# Altium PCB HMI_2.0_R0.PcbDoc
Units mil, origin at the board's own origin, x right, y up, seen from the top; angles counter-clockwise.
Board outline 6000 x 4000 mil, 2 copper layers (Top Layer, Bottom Layer); 41 components, 39 nets, 158 pads, 0 vias.
Unrouted connection lines stored in the file: 97.
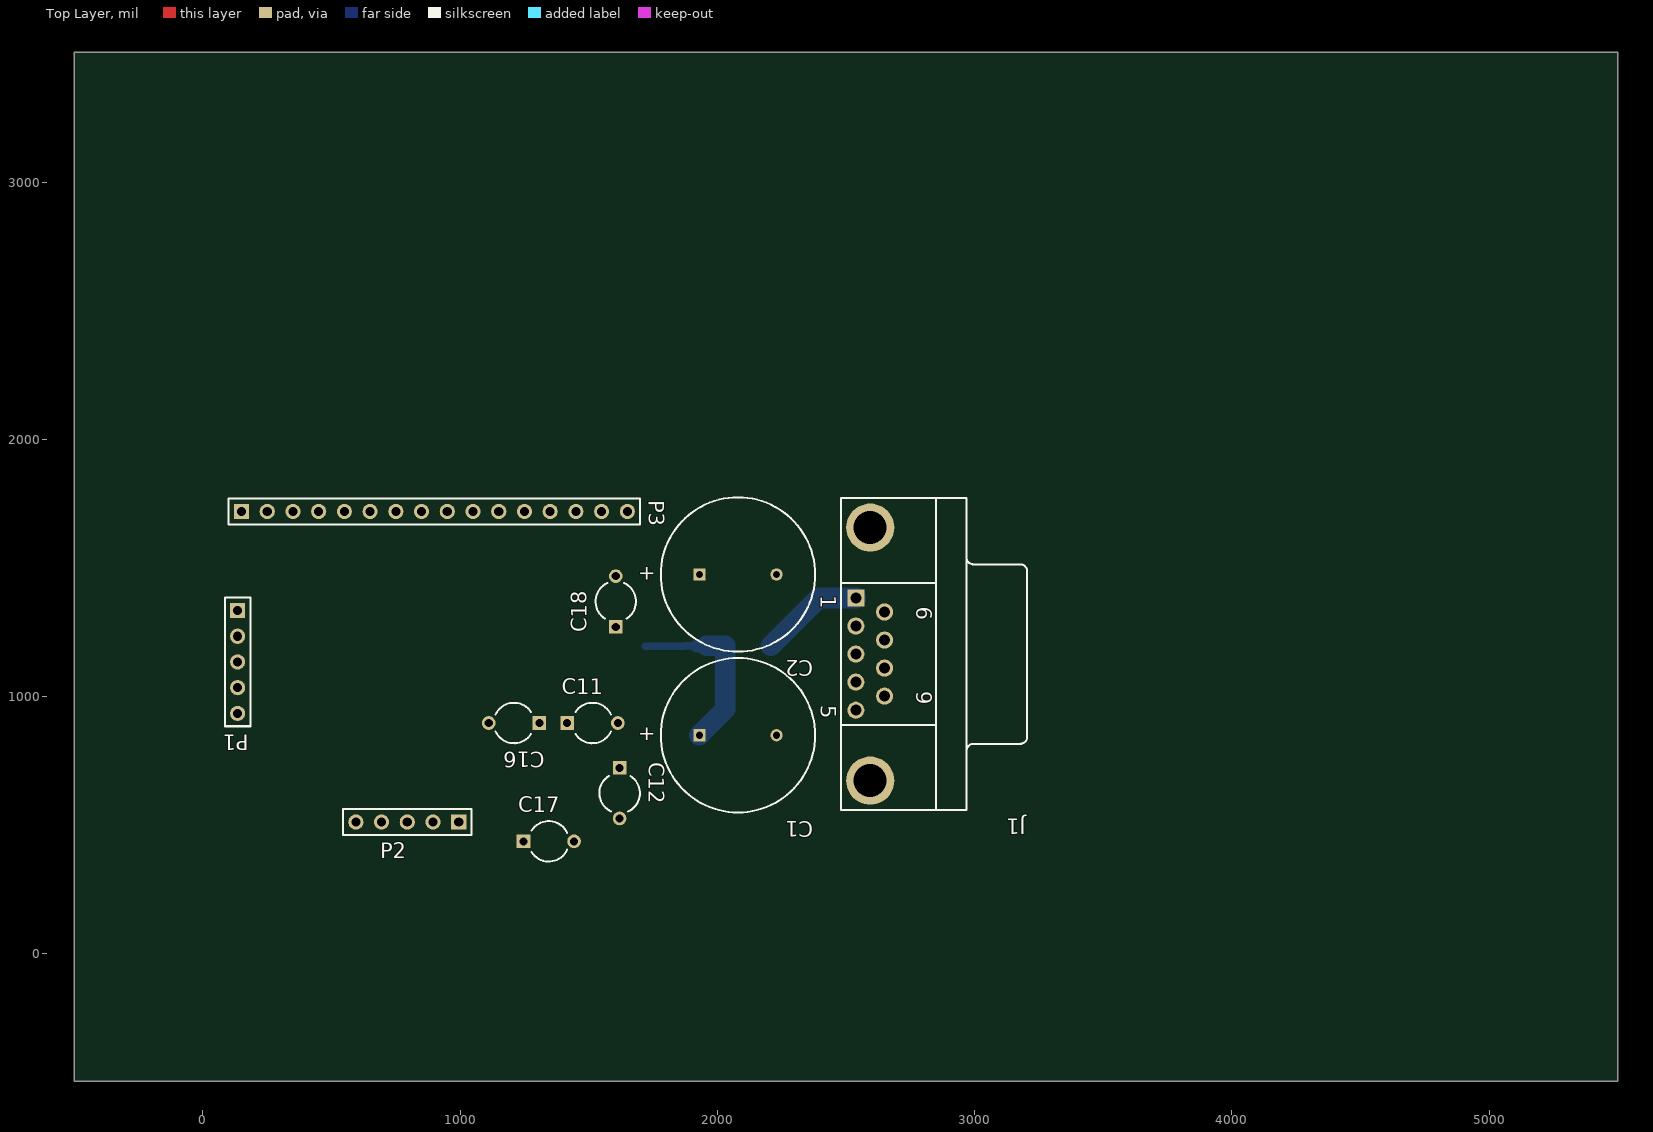
[diagram p0: Top Layer view]
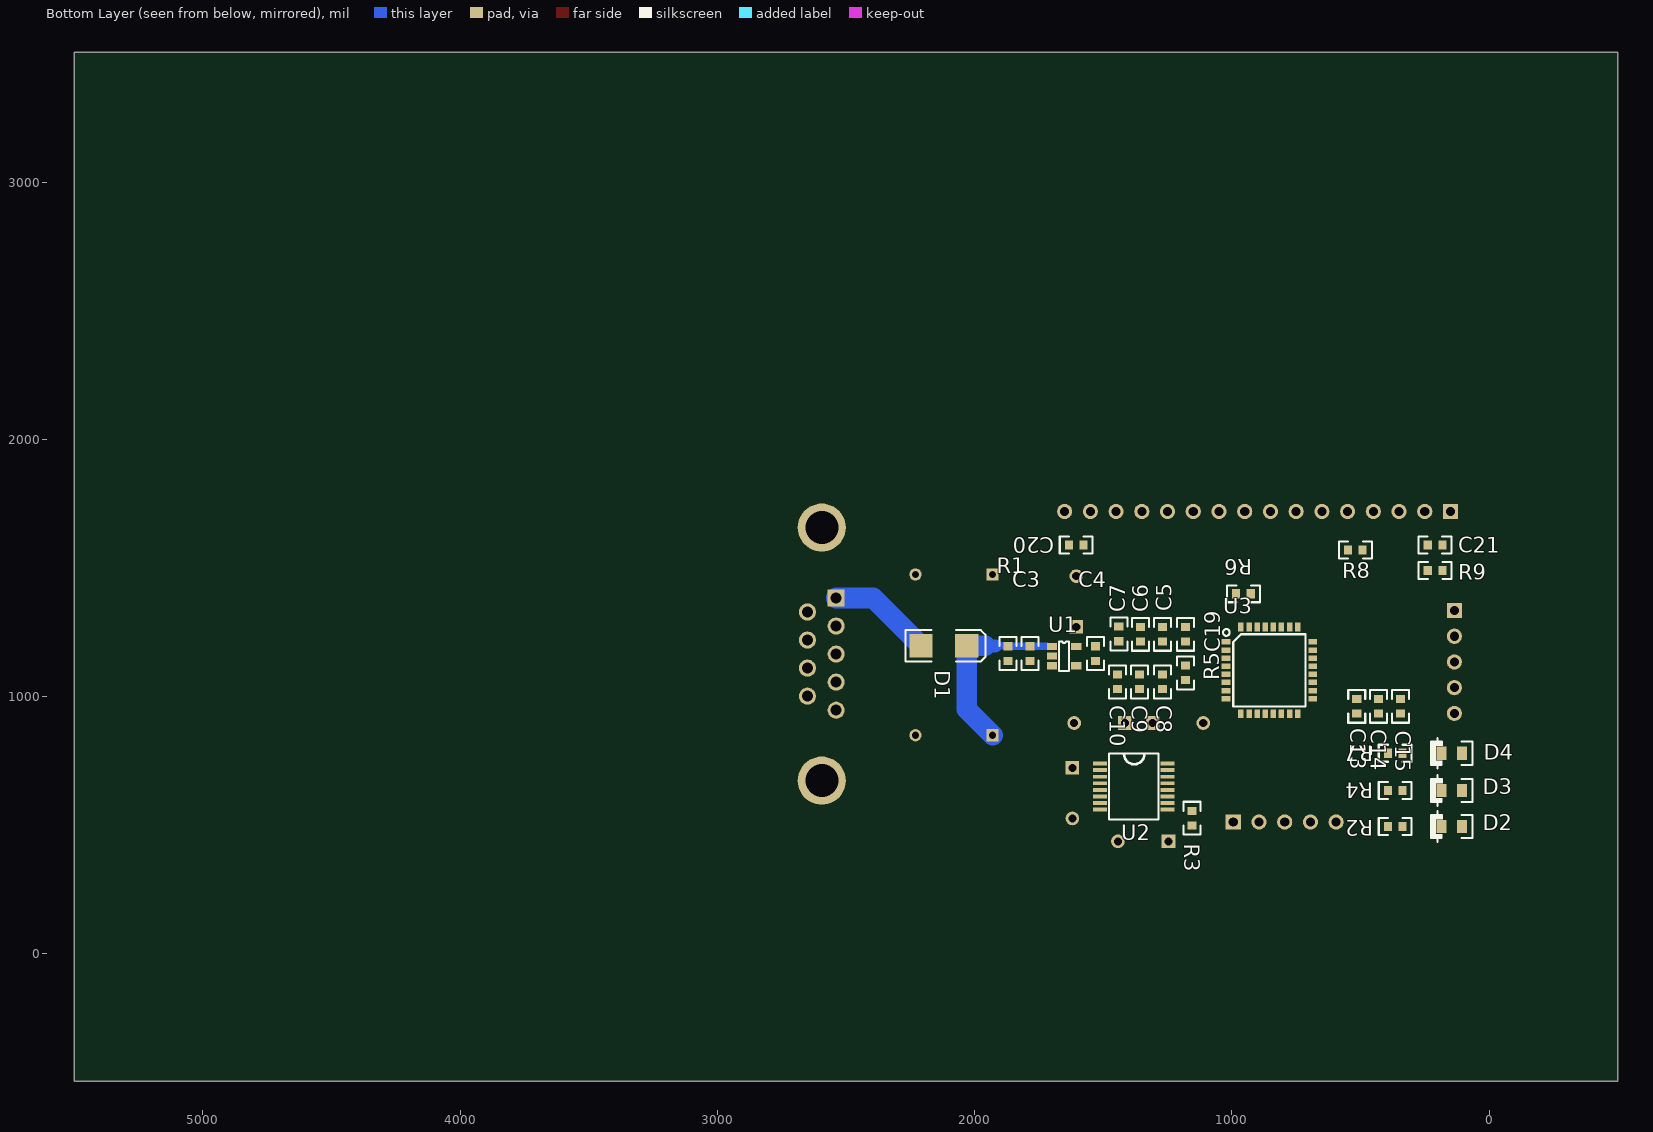
[diagram p1: Bottom Layer view, seen from below]

## Layer stack, top to bottom
Top Solder: solder mask 0.4, Solder Resist, Dk 3.5
Top Layer: signal copper 1.4
Dielectric 1: dielectric 12.6, FR-4, Dk 4.8
Bottom Layer: signal copper 1.4
Bottom Solder: solder mask 0.4, Solder Resist, Dk 3.5

## Board outline
-500,-495 5500,-495 5500,3505 -500,3505

## Design rules (kind name [scope] priority, off if disabled: settings)
Clearance [All] p1: gap=10 ignorepadtopadclearanceinfootprint=FALSE except(0: Arc-Hole Track-Hole SMDPad-Hole THPad-Hole Via-Hole Fill-Hole Poly-Hole Region-Hole Text-Hole)
PolygonConnect [All] p1: connectstyle=Relief reliefconductorwidth=10 reliefentries=4 polygonreliefangle="90 Angle" airgapwidth=10
RoutingVias [All] p1: holewidth=28 width=50 viastyle="Through Hole" minholewidth=28 minwidth=50 maxholewidth=28 maxwidth=50
SolderMaskExpansion [All] p1: expansion=4
Width [All] p1: maxlimit=80 minlimit=12 preferedwidth=20
30 further rules are at their usual default settings.

## Components (designator, comment, footprint, x,y, rotation, side; value= is the part's Value field where it differs from the comment)
C1 "" RB7.6-15 2080,850 r180 top value=100pF
C2 "" RB7.6-15 2080,1475 r180 top value=104pF
C3 "" 0603 1784.49,1167.6 r90 bottom value=104pF
C4 "" 0603 1529.49,1167.6 r90 bottom value=100pF
C5 "CTP1" 0603 1269.49,1242.6 r270 bottom value=10pF
C6 "CTP1" 0603 1354.49,1242.6 r270 bottom value=33pF
C7 "CTP1" 0603 1439.49,1244.05 r270 bottom value=104pF
C8 "CTP5" 0603 1269.49,1057.6 r90 bottom value=10pF
C9 "CTP5" 0603 1359.49,1057.6 r90 bottom value=33pF
C10 "CTP5" 0603 1444.49,1057.6 r90 bottom value=220pF
C11 "" CAPR5-4X5 1514.49,897.6 r0 top value=10uF
C12 "" CAPR5-4X5 1620,625 r270 top value=10uF
C13 "CTP17" 0603 514.49,962.6 r90 bottom value=10pF
C14 "CTP17" 0603 429.49,962.6 r90 bottom value=33pF
C15 "CTP17" 0603 344.49,962.6 r90 bottom value=104pF
C16 "" CAPR5-4X5 1209.49,897.6 r180 top value=10uF
C17 "" CAPR5-4X5 1344.49,437.6 r0 top value=10uF
C18 "" CAPR5-4X5 1605,1370 r90 top value=10uF
C19 "" 0603 1179.49,1242.6 r270 bottom value=100pF
C20 "" 0603 1605,1590 r0 bottom value=100pF
C21 "" 0603 210,1590 r0 bottom value=100pF
D1 "" SMB 2119.49,1197.6 r180 bottom
D2 "" 0805D 145,495 r0 bottom
D3 "" 0805D 145,635 r0 bottom
D4 "" 0805D 145,780 r0 bottom
J1 "" DSUB1.385-2H9 2968.11,1165.47 r270 top
P1 "" HDR1X5 135,1335 r270 top
P2 "" HDR1X5 994.49,512.6 r180 top
P3 "" HDR1X16 150,1720 r0 top
R1 "" 0603 1869.49,1167.6 r90 bottom value=1K
R2 "" 0603 365,495 r180 bottom value=1K
R3 "" 0603 1154.49,527.6 r270 bottom value=1K
R4 "" 0603 365,635 r0 bottom value=1K
R5 "" 0603 1179.49,1092.6 r270 bottom value=1K
R6 "" 0603 955,1400 r180 bottom value=1K
R7 "" 0603 365,780 r0 bottom value=1K
R8 "" 0603 520,1570 r180 bottom value=1K
R9 "" 0603 210,1490 r180 bottom value=1K
U1 "*" SOT-23-5L 1699.49,1195 r180 bottom
U2 "MAX232*" SSOP16 1512.09,739.96 r180 bottom
U3 "*" LQFP32 854.49,1102.6 r180 bottom

## Footprints (in the part's own frame and the unit in brackets; to place one, negate y for a bottom-side part, rotate by r counter-clockwise, add the part's x,y. Pads: shape width x height; smd on the part's side, far side on the other; paste and mask are expansions set on the pad)
0603 [mm]
  rect 0.8x0.9 smd: 1(-0.725,0) 2(0.725,0)
  silkscreen extent -1.63,-0.84 1.63,0.84
0805D [mm]
  rect 1x1.3 smd: 1(-1,0) 2(1,0)
  silkscreen extent -2.03,-1.52 2.03,1.52
CAPR5-4X5 [mm] "Capacitor; 2 Leads"
  rect 1.35x1.35 hole 0.8: 1(-2.5,0)
  round 1.35 hole 0.8: 2(2.5,0)
  silkscreen extent -1.69,-2 1.82,2
DSUB1.385-2H9 [mm] "Connector; D Subminiature; 9 Position; Right Angle; Pitch 1.385 mm"
  rect 1.69x1.69 hole 1.09: 1(-5.54,-10.92)
  round 1.69 hole 1.09: 2(-2.77,-10.92) 3(0,-10.92) 4(2.77,-10.92) 5(5.54,-10.92) 6(-4.155,-8.08) 7(-1.385,-8.08) 8(1.385,-8.08) 9(4.155,-8.08)
  round 4.76 hole 3.26: 10(-12.495,-9.5) 11(12.495,-9.5)
  silkscreen extent -15.4,-12.4 15.4,6
HDR1X5 [mm] "Connector; Header; 5 Position"
  rect 1.5x1.5 hole 0.9: 1(0,0)
  round 1.5 hole 0.9: 2(2.54,0) 3(5.08,0) 4(7.62,0) 5(10.16,0)
  silkscreen extent -1.27,-1.27 11.43,1.27
HDR1X16 [mm] "Connector; Header; 16 Position"
  rect 1.5x1.5 hole 0.9: 1(0,0)
  round 1.5 hole 0.9: 2(2.54,0) 3(5.08,0) 4(7.62,0) 5(10.16,0) 6(12.7,0) 7(15.24,0) 8(17.78,0) 9(20.32,0) 10(22.86,0) 11(25.4,0) 12(27.94,0) 13(30.48,0) 14(33.02,0) 15(35.56,0) 16(38.1,0)
  silkscreen extent -1.27,-1.27 39.37,1.27
LQFP32 [mm]
  rect 0.85x0.54 smd: 1(-4.275,2.8) 2(-4.275,2) 3(-4.275,1.2) 4(-4.275,0.4) 5(-4.275,-0.4) 6(-4.275,-1.2) 7(-4.275,-2) 8(-4.275,-2.8) 17(4.275,-2.8) 18(4.275,-2) 19(4.275,-1.2) 20(4.275,-0.4) 21(4.275,0.4) 22(4.275,1.2) 23(4.275,2) 24(4.275,2.8)
  rect 0.54x0.85 smd: 9(-2.8,-4.275) 10(-2,-4.275) 11(-1.2,-4.275) 12(-0.4,-4.275) 13(0.4,-4.275) 14(1.2,-4.275) 15(2,-4.275) 16(2.8,-4.275) 25(2.8,4.275) 26(2,4.275) 27(1.2,4.275) 28(0.4,4.275) 29(-0.4,4.275) 30(-1.2,4.275) 31(-2,4.275) 32(-2.8,4.275)
  silkscreen extent -4.57,-3.56 3.56,4.06
RB7.6-15 [mm] "Polarized Capacitor (Radial); 2 Leads"
  rect 1.2x1.2 hole 0.7: 1(3.81,0)
  round 1.2 hole 0.7: 2(-3.81,0)
  silkscreen extent -7.62,-7.62 7.62,7.62
SMB [mm] "DO-214-AA/SMB; 2 C-Bend Leads; Body 5.3 x 3.6 mm, inc. leads (LxW)"
  rect 2.3x2.3 smd: 1(-2.25,0) 2(2.25,0)
  silkscreen extent -3.8,-1.55 4.1,1.55
SOT-23-5L [mm]
  rect 1x0.7 smd: 1(0,0) 2(0,-0.95) 3(0,-1.9) 4(2.4,-1.9) 5(2.4,0)
  silkscreen extent 0.71,-2.41 1.7,0.51
SSOP16 [mm]
  rect 1.37x0.381 smd: 1(0,0) 2(0,-0.65) 3(0,-1.3) 4(0,-1.95) 5(0,-2.6) 6(0,-3.25) 7(0,-3.9) 8(0,-4.55) 9(6.67,-4.55) 10(6.67,-3.9) 11(6.67,-3.25) 12(6.67,-2.6) 13(6.67,-1.95) 14(6.67,-1.3) 15(6.67,-0.65) 16(6.67,0)
  silkscreen extent 0.89,-5.53 5.77,0.98

## Part data
C1 C2: library part "Cap Pol1", "Polarized Capacitor (Radial)", LatestRevisionDate=17-Jul-2002, LatestRevisionNote="Re-released for DXP Platform.", PackageDescription="Polarized Capacitor (Radial); 2 Leads", PackageReference=RB7.6-15, Published=8-Jun-2000, Publisher="Altium Limited"
C3 C4 C5 C6 C7 C8 C9 C10 C13 C14 C15 C19 C20 C21: library part Cap, "Capacitor", LatestRevisionDate=17-Jul-2002, LatestRevisionNote="Re-released for DXP Platform.", PackageDescription="Radial Cap, Thru-Hole; 2 Leads; 0.3 in Pin Spacing", PackageReference=RAD-0.3, Published=8-Jun-2000, Publisher="Altium Limited"
C11 C12 C16 C17 C18: library part Cap2, "Capacitor", PackageDescription="Capacitor; 2 Leads", PackageReference=CAPR5-4X5, Published=23-Sep-2002, Publisher="Altium Limited"
D1: library part "D Schottky", "Schottky Diode", Code_JEDEC=DO-214-AA, LatestRevisionDate=17-Jul-2002, LatestRevisionNote="Re-released for DXP Platform.", PackageDescription="DO-214-AA/SMB; 2 C-Bend Leads; Body 5.3 x 3.6 mm, inc. leads (LxW)", PackageReference=SMB, Published=8-Jun-2000, Publisher="Altium Limited"
D2 D3 D4: library part LED0, "Typical INFRARED GaAs LED", LatestRevisionDate=08-Jul-2005, LatestRevisionNote="Mech Layer 1 removed.", PackageDescription="LED; 2 Leads", PackageReference=LED-0, Published=8-Jun-2000, Publisher="Altium Limited"
J1: library part "D Connector 9", "Receptacle Assembly, 9 Position, Right Angle", PackageDocument=O, DatasheetDocument=1-Sep-1999, Gender=Receptacle, LatestRevisionDate=17-Jul-2002, LatestRevisionNote="Re-released for DXP Platform.", Orientation="Right Angle", PackageReference=788750, Positions=9, Published=15-Jun-2001, Publisher="Altium Limited"
P1 P2: library part "Header 5", "Header, 5-Pin", LatestRevisionDate=17-Jul-2002, LatestRevisionNote="Re-released for DXP Platform.", Publisher="Altium Limited"
P3: library part "Header 16", "Header, 16-Pin", LatestRevisionDate=17-Jul-2002, LatestRevisionNote="Re-released for DXP Platform.", Publisher="Altium Limited"
R1: library part "Res Semi", "Semiconductor Resistor", LatestRevisionDate=17-Jul-2002, LatestRevisionNote="Re-released for DXP Platform.", PackageDescription="Axial Device, Thru-Hole; 2 Leads; 0.5 in Pin Spacing", PackageReference=AXIAL-0.5, Published=8-Jun-2000, Publisher="Altium Limited"
R2 R3 R4 R5 R6 R7 R8 R9: library part Res3, "Resistor", LatestRevisionDate=29-May-2009, LatestRevisionNote="IPC-7351 Footprint Added.", PackageDescription="Chip Resistor", PackageReference=J1-0603, Published=8-Jun-2000, Publisher="Altium Limited"
U1: library part VRH3302
U2: library part MAX232
U3: library part STM32F030K6, Supplier Part Number 1=8294644, Supplier 1=RSComponents

## Nets (pads, with @x,y where several pads share a name; then routed paths per layer and width w, separated by ;. In a path a pad name is that pad's centre, name@x,y a point inside that pad or via, vN(x,y) a via of type N, cw(c..) or ccw(c..) an arc to the next point about the centre after c; other vN are vias at no path point)
+3V3: C2.1 C4.2 C5.2 C6.2 C7.2 C8.2 C9.2 C10.2 C13.2 C14.2 C15.2 C18.1 P1.5 R3.2 R5.2 U1.5 U2.16 U3.1 U3.5 U3.17
+5V: C1.1 C3.2 C20.1 C21.2 D1.2 D2.1 P3.2 P3.15 R1.2 U1.1 | length 701.7
  Bottom Layer w30: 1719.49,1196.38 1784.49,1196.38 C3.2 R1.2 1870.94,1197.6 1919.49,1197.6
  Bottom Layer w50: 1919.49,1197.6 1959.49,1197.6
  Bottom Layer w80: C1.1 2030.91,950.91 D1.2 1959.49,1197.6
GND: C1.2 C2.2 C3.1 C4.1 C5.1 C6.1 C7.1 C8.1 C9.1 C10.1 C13.1 C14.1 C15.1 C16.2 C17.1 C18.2 C19.1 C20.2 C21.1 D3.1 J1.5 P1.1 P2.5 P3.1 P3.16 R2.1 R6.1 R7.2 R8.2 R9.2 U1.2 U2.15 U3.16 U3.32
NetC11_1: C11.1 U2.1
NetC11_2: C11.2 U2.3
NetC12_1: C12.1 U2.4
NetC12_2: C12.2 U2.5
NetC16_1: C16.1 U2.2
NetC17_2: C17.2 U2.6
NetC19_2: C19.2 P1.3 R5.1 U3.4
NetD1_1: D1.1 J1.1 | length 407.2
  Bottom Layer w80: D1.1 2394.05,1383.58 J1.1
NetD2_2: D2.2 R2.2
NetD3_2: D3.2 R4.1
NetD4_1: D4.1 U3.12
NetD4_2: D4.2 R7.1
NetJ1_2: J1.2 R4.2 U2.8
NetJ1_3: J1.3 U2.7
NetP1_2: P1.2 U3.24
NetP1_4: P1.4 U3.23
NetP2_1: P2.1 U3.6
NetP2_2: P2.2 U3.7
NetP2_3: P2.3 U3.10
NetP2_4: P2.4 U3.18
NetP3_3: P3.3 R9.1
NetP3_4: P3.4 U3.13
NetP3_5: P3.5 R8.1 U3.19
NetP3_6: P3.6 U3.20
NetP3_7: P3.7 U3.30
NetP3_8: P3.8 U3.29
NetP3_9: P3.9 U3.28
NetP3_10: P3.10 U3.27
NetP3_11: P3.11 U3.26
NetP3_12: P3.12 U3.25
NetP3_13: P3.13 U3.22
NetP3_14: P3.14 U3.21
NetR1_1: R1.1 U1.3
NetR3_1: R3.1 U2.9 U3.9
NetR6_2: R6.2 U3.31
NetU2_10: U2.10 U3.8
pads on no net: J1.4 J1.6 J1.7 J1.8 J1.9 J1.10 J1.11 U1.4 U2.11 U2.12 U2.13 U2.14 U3.2 U3.3 U3.11 U3.14 U3.15

## Text inside footprints (layer, text, board x,y; h text height)
C1: Top Overlay "+" at 1759.85,879.01 h59.06 r180
C2: Top Overlay "+" at 1759.85,1504.01 h59.06 r180
J1: Top Overlay "6" at 2772.24,1348.74 h59.06 r270; Top Overlay "9" at 2772.24,1021.57 h59.06 r270; Top Overlay "5" at 2402.17,967.05 h59.06 r270; Top Overlay "1" at 2402.17,1393.43 h59.06 r270